# Altium PCB VNA_CHANNEL2.PcbDoc
Units mm, origin at the board's own origin, x right, y up, seen from the top; angles counter-clockwise.
Board outline 32.68 x 75 mm, 4 copper layers (Top Layer, GND, PWR, Bottom Layer), stack 0.758 mm thick; 166 components, 165 nets, 685 pads, 229 vias.
Unrouted connection lines stored in the file: 404.
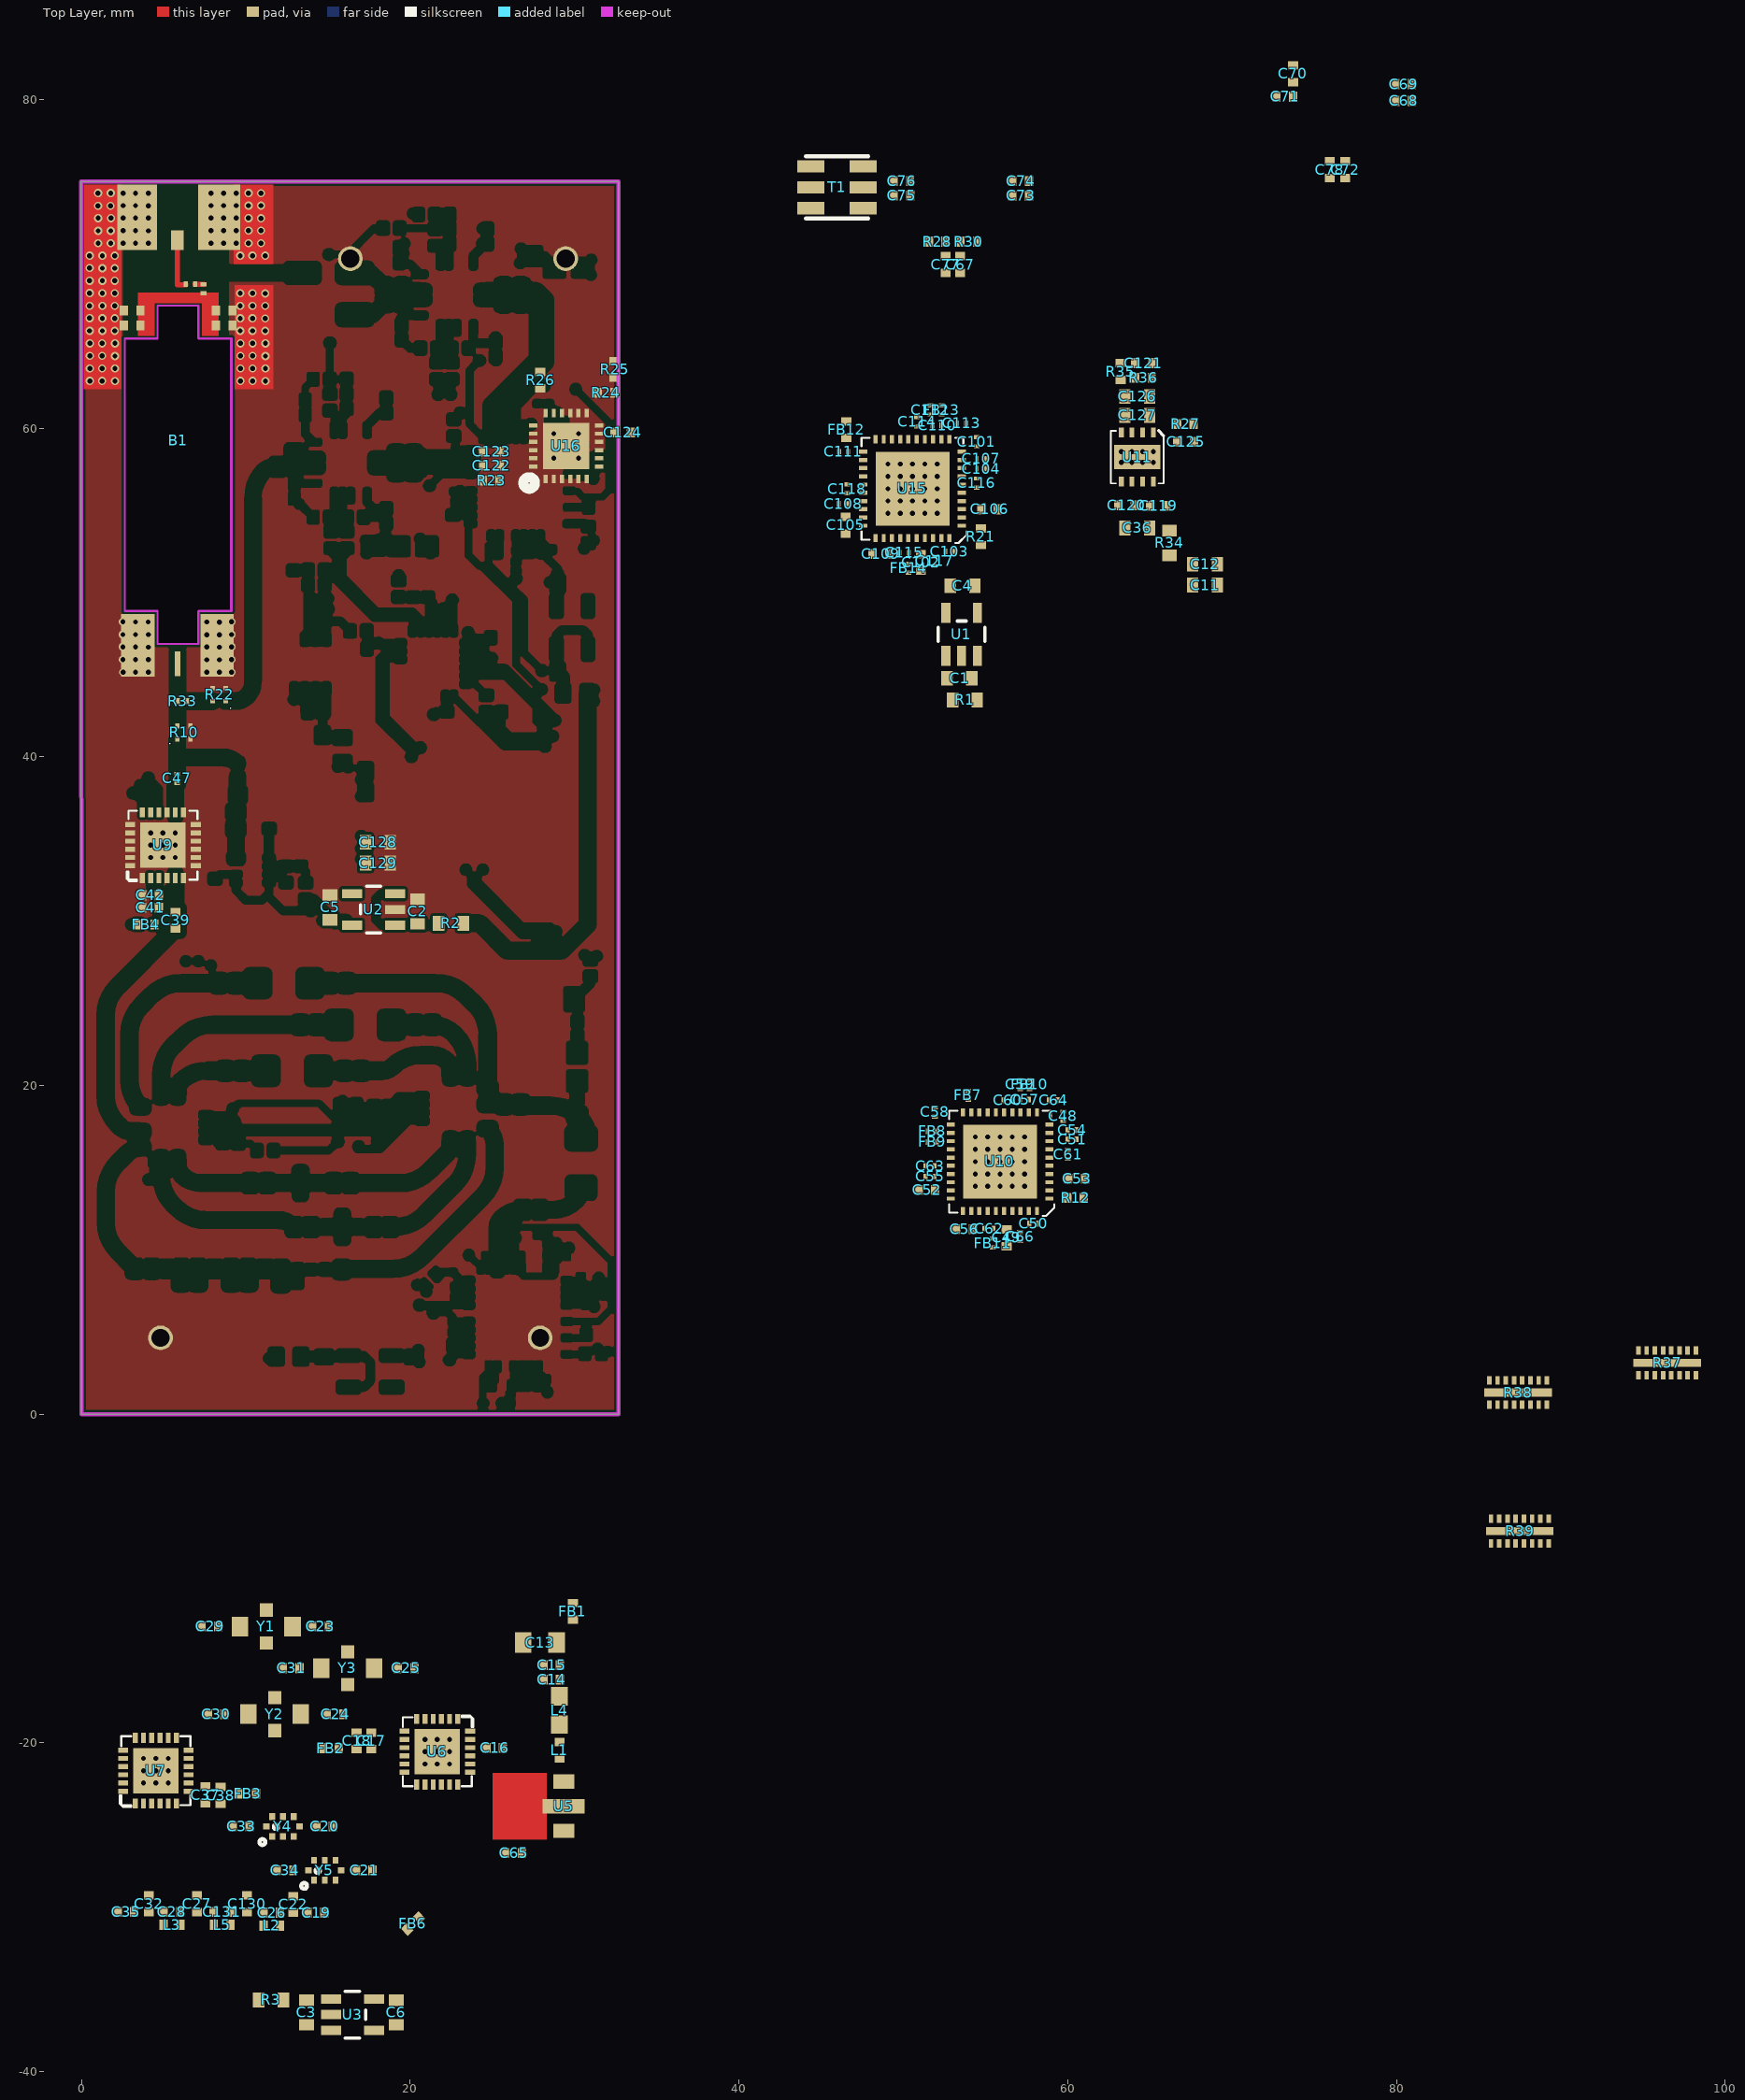
[diagram p0: Top Layer view]
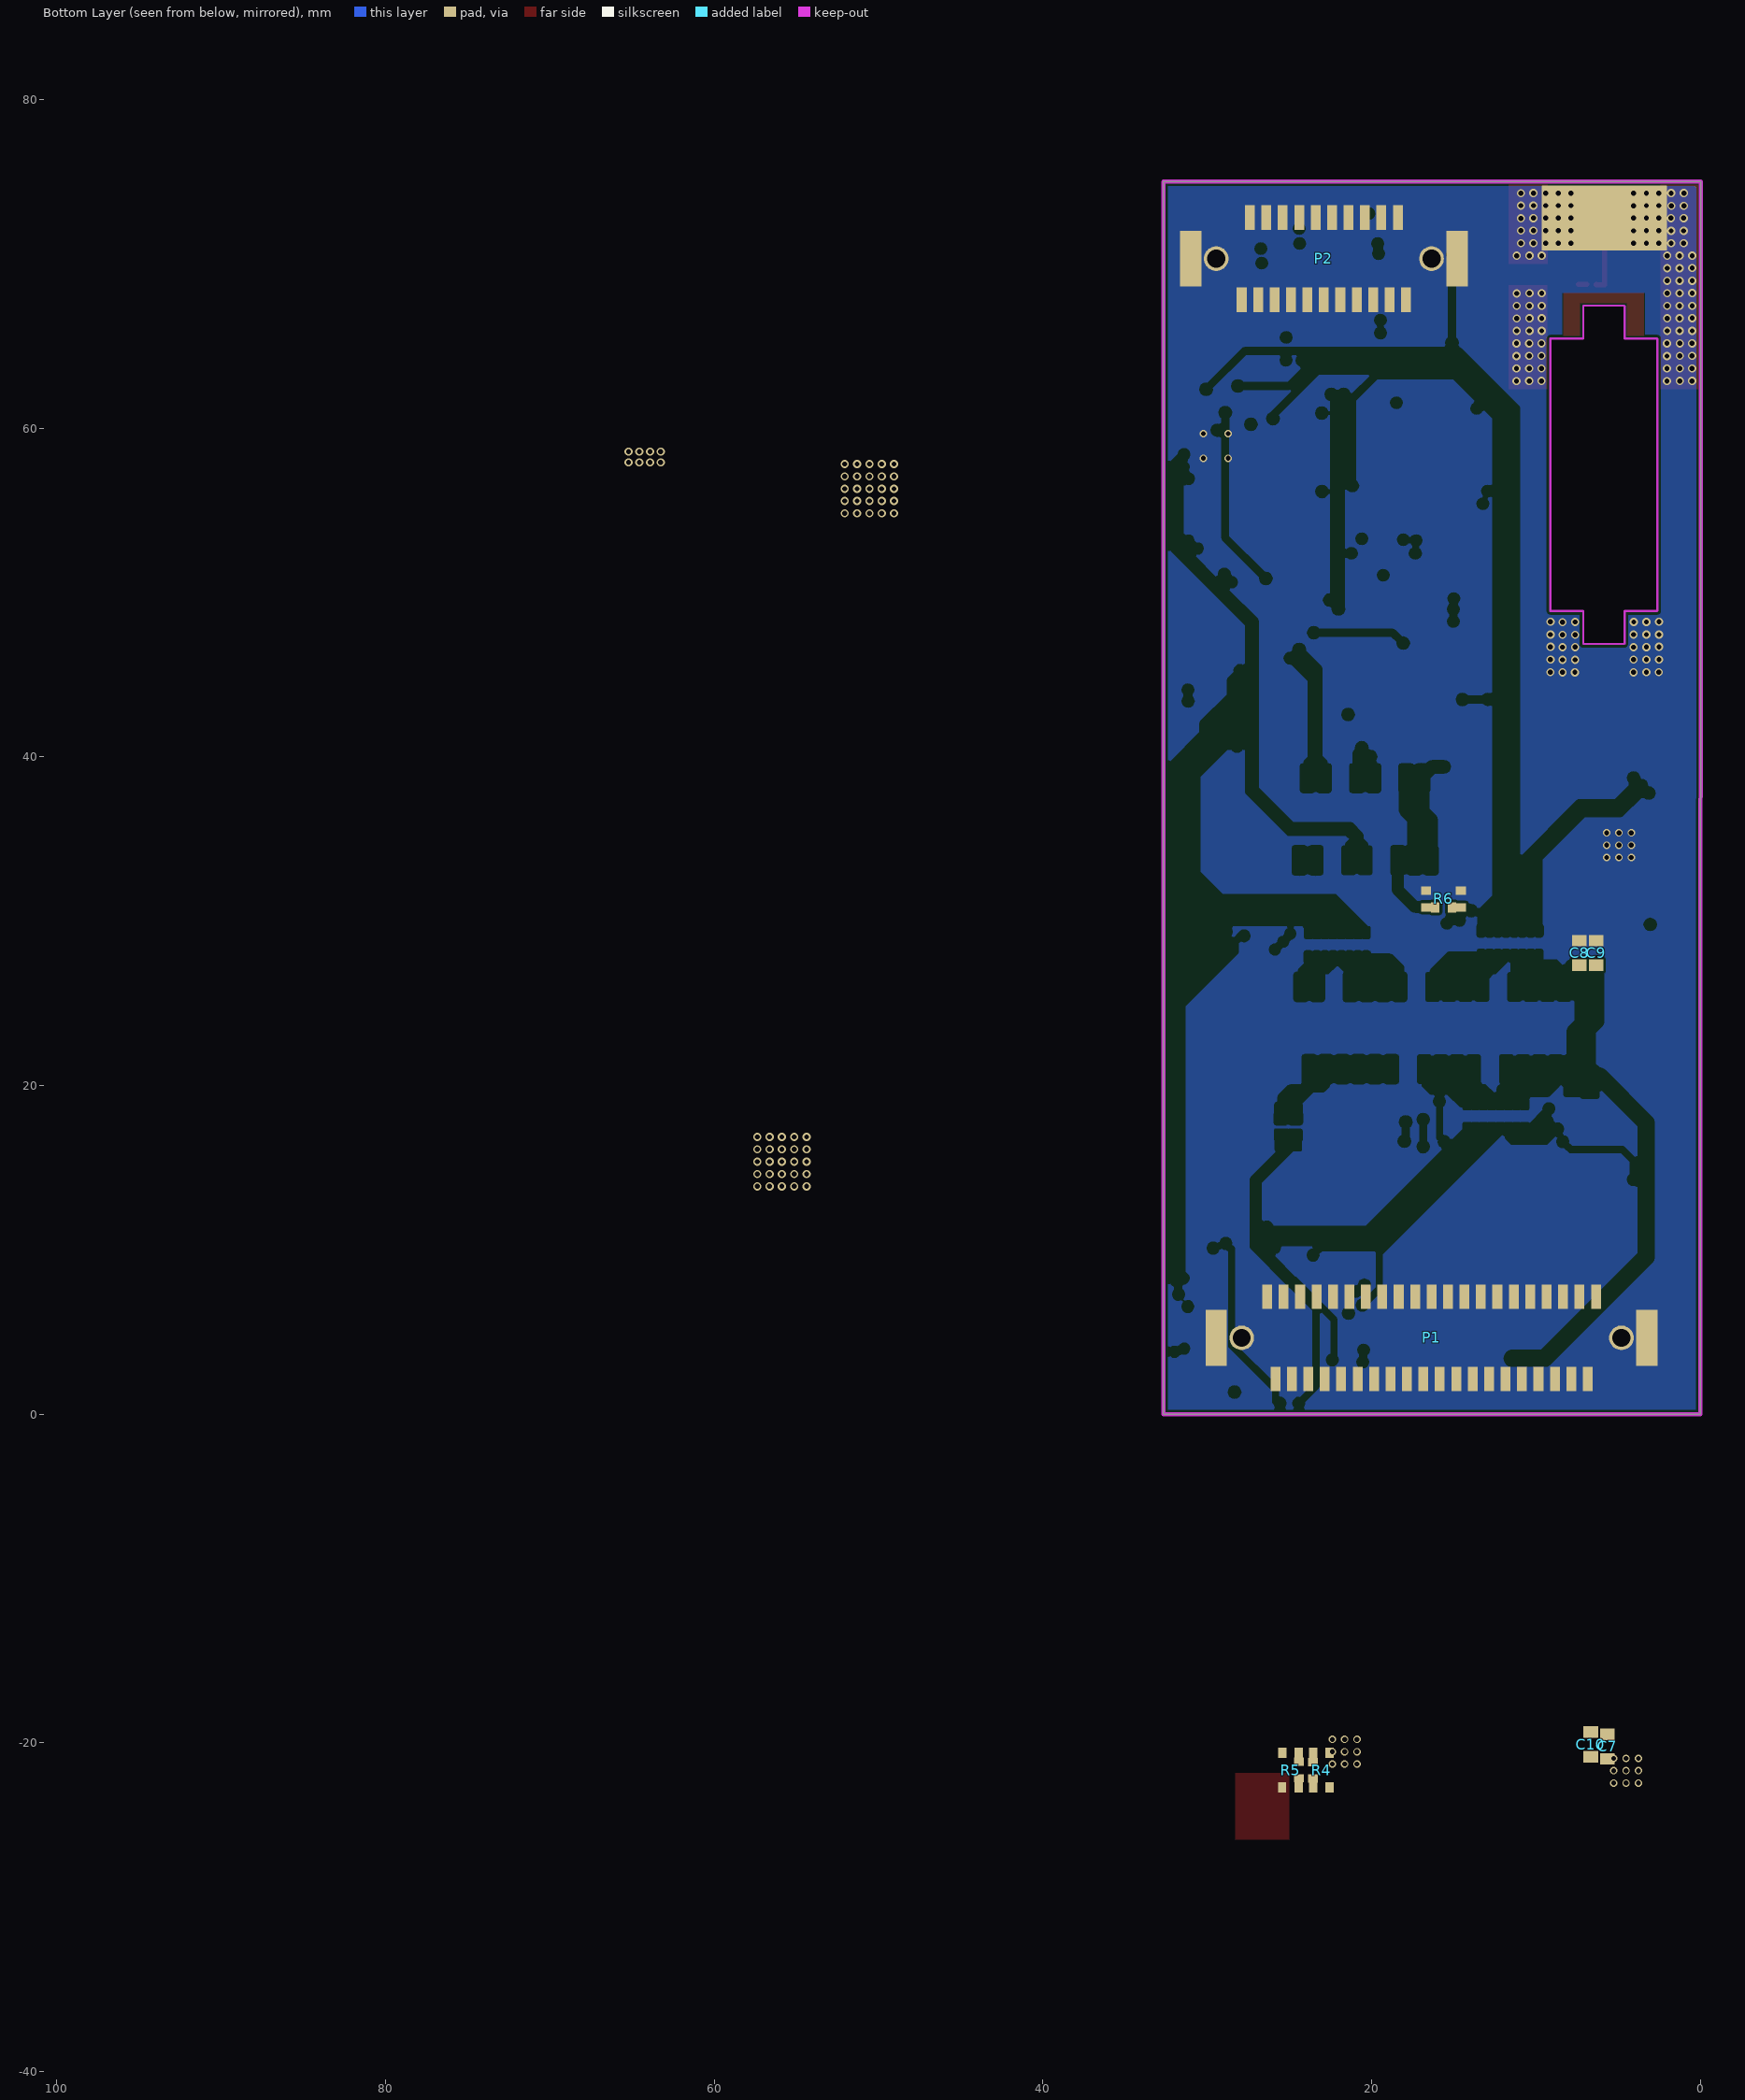
[diagram p1: Bottom Layer view, seen from below]
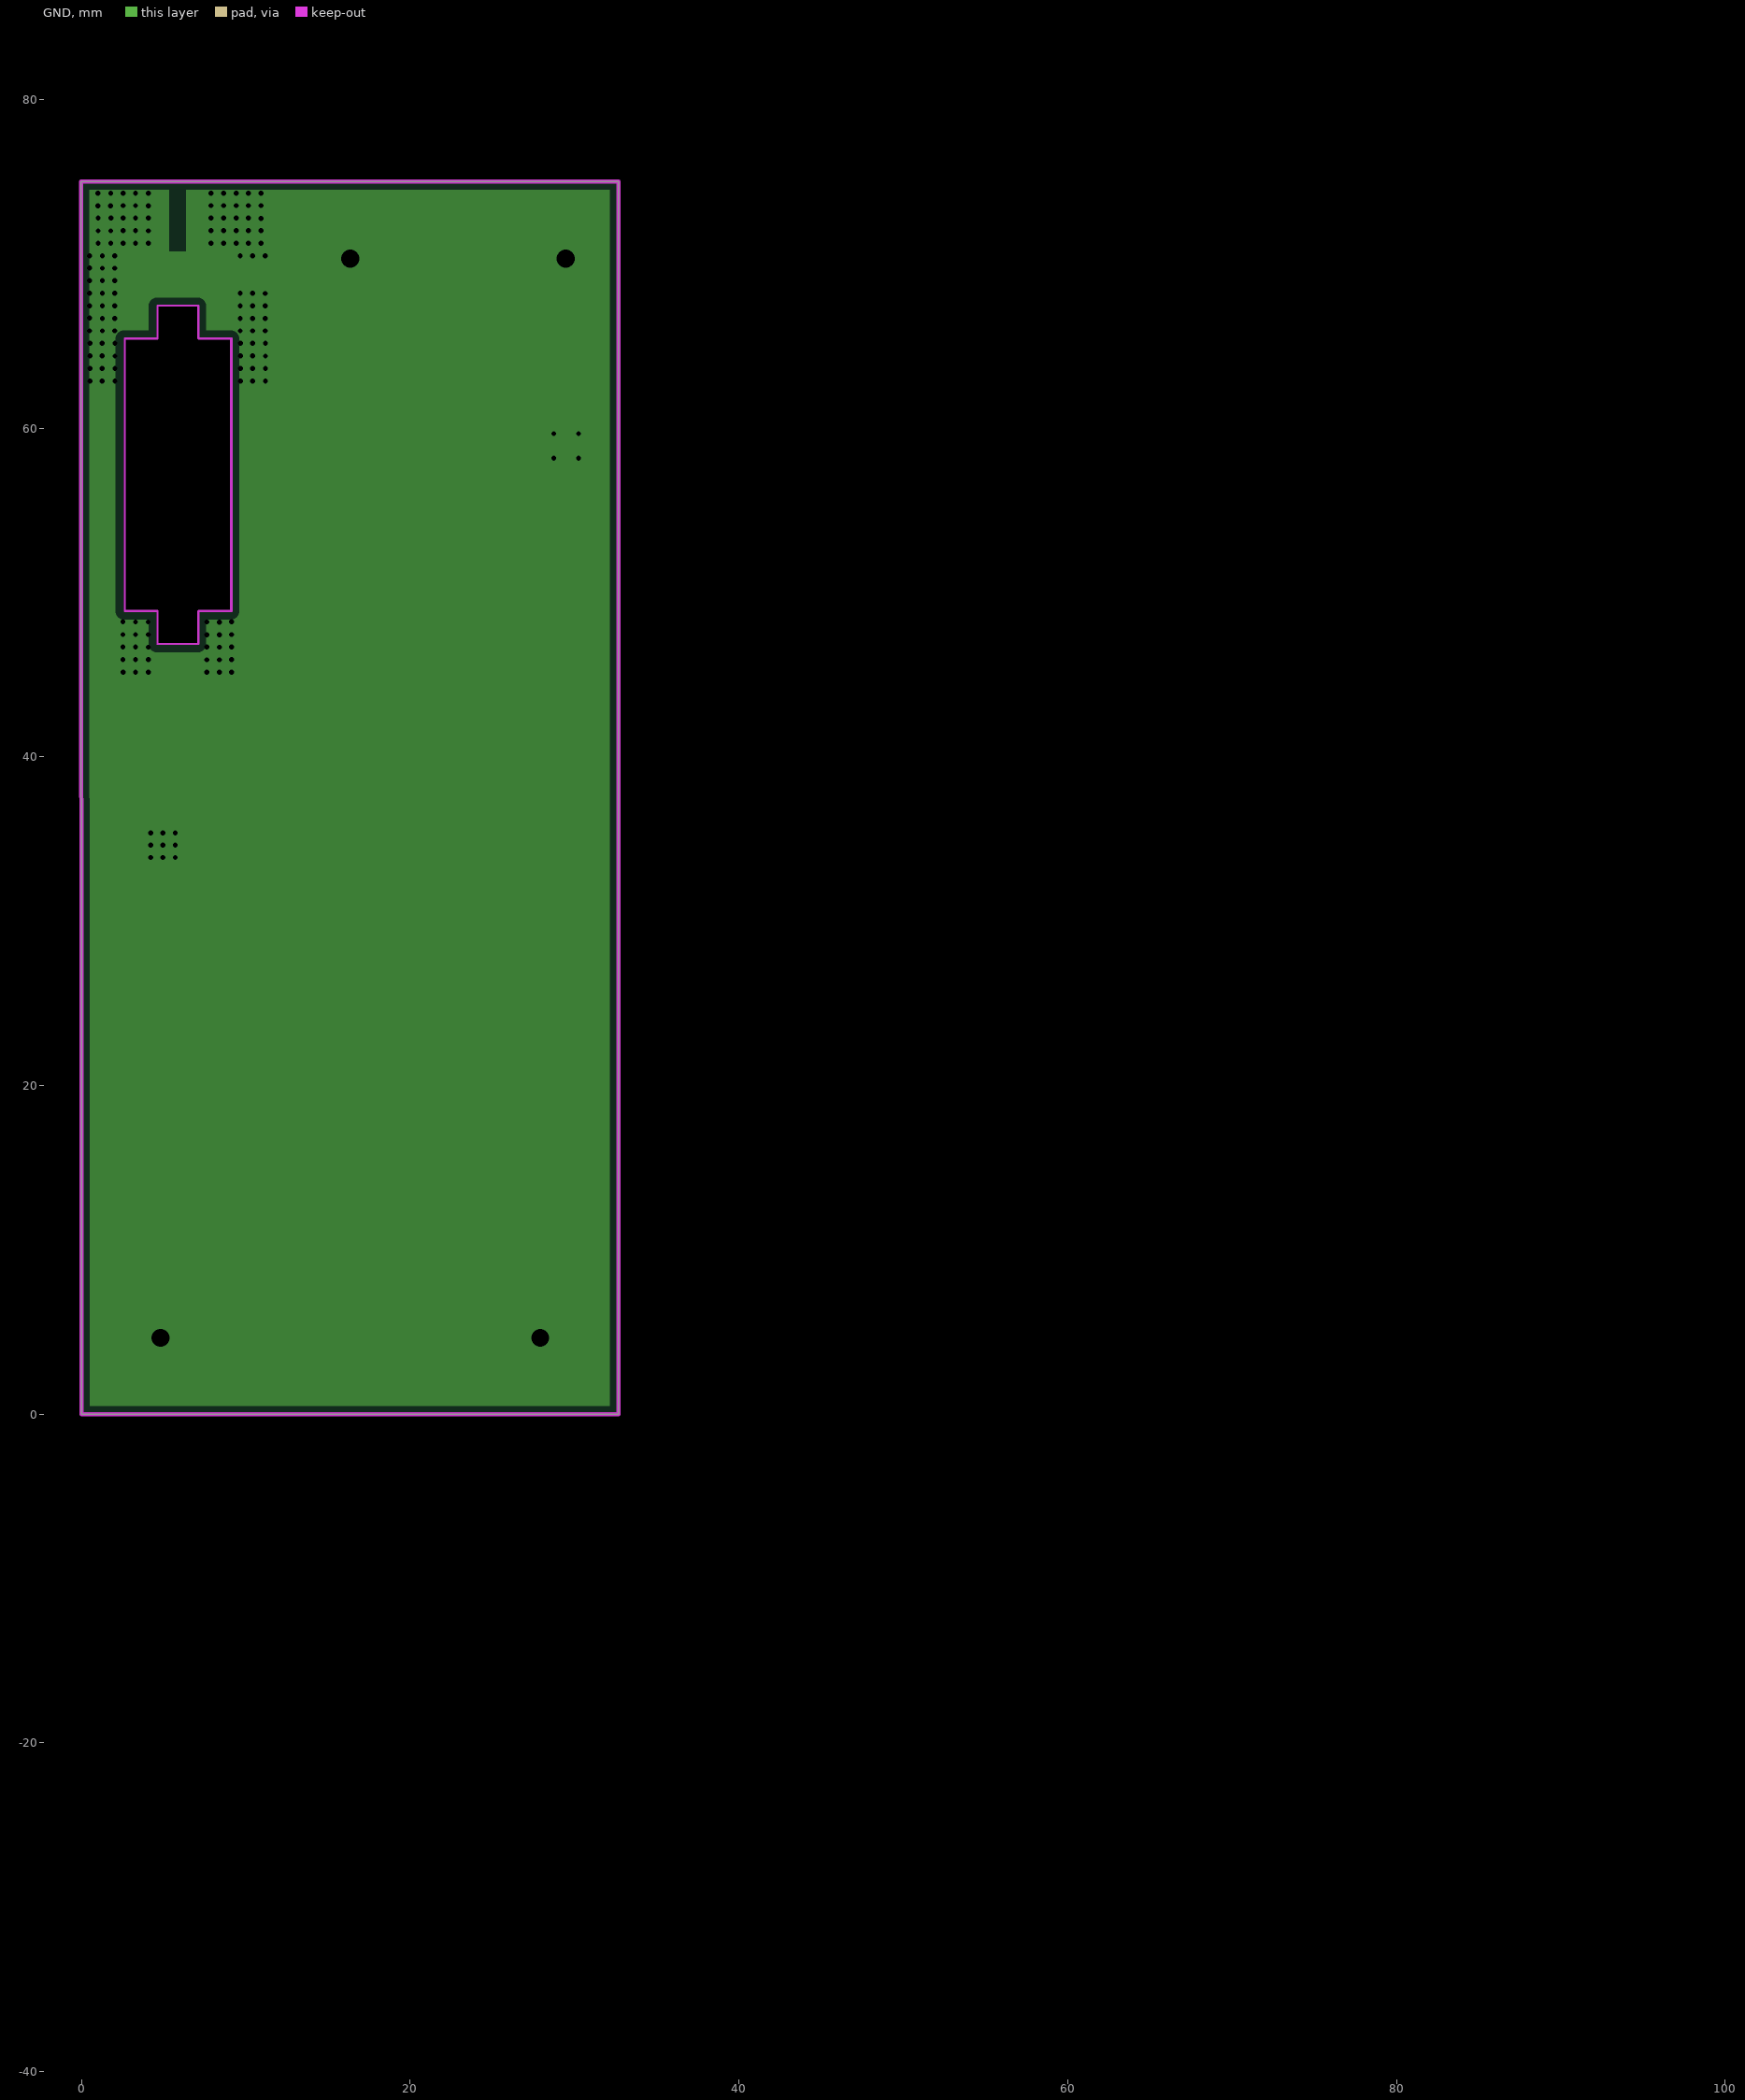
[diagram p2: GND, clearances drawn from the general rule]
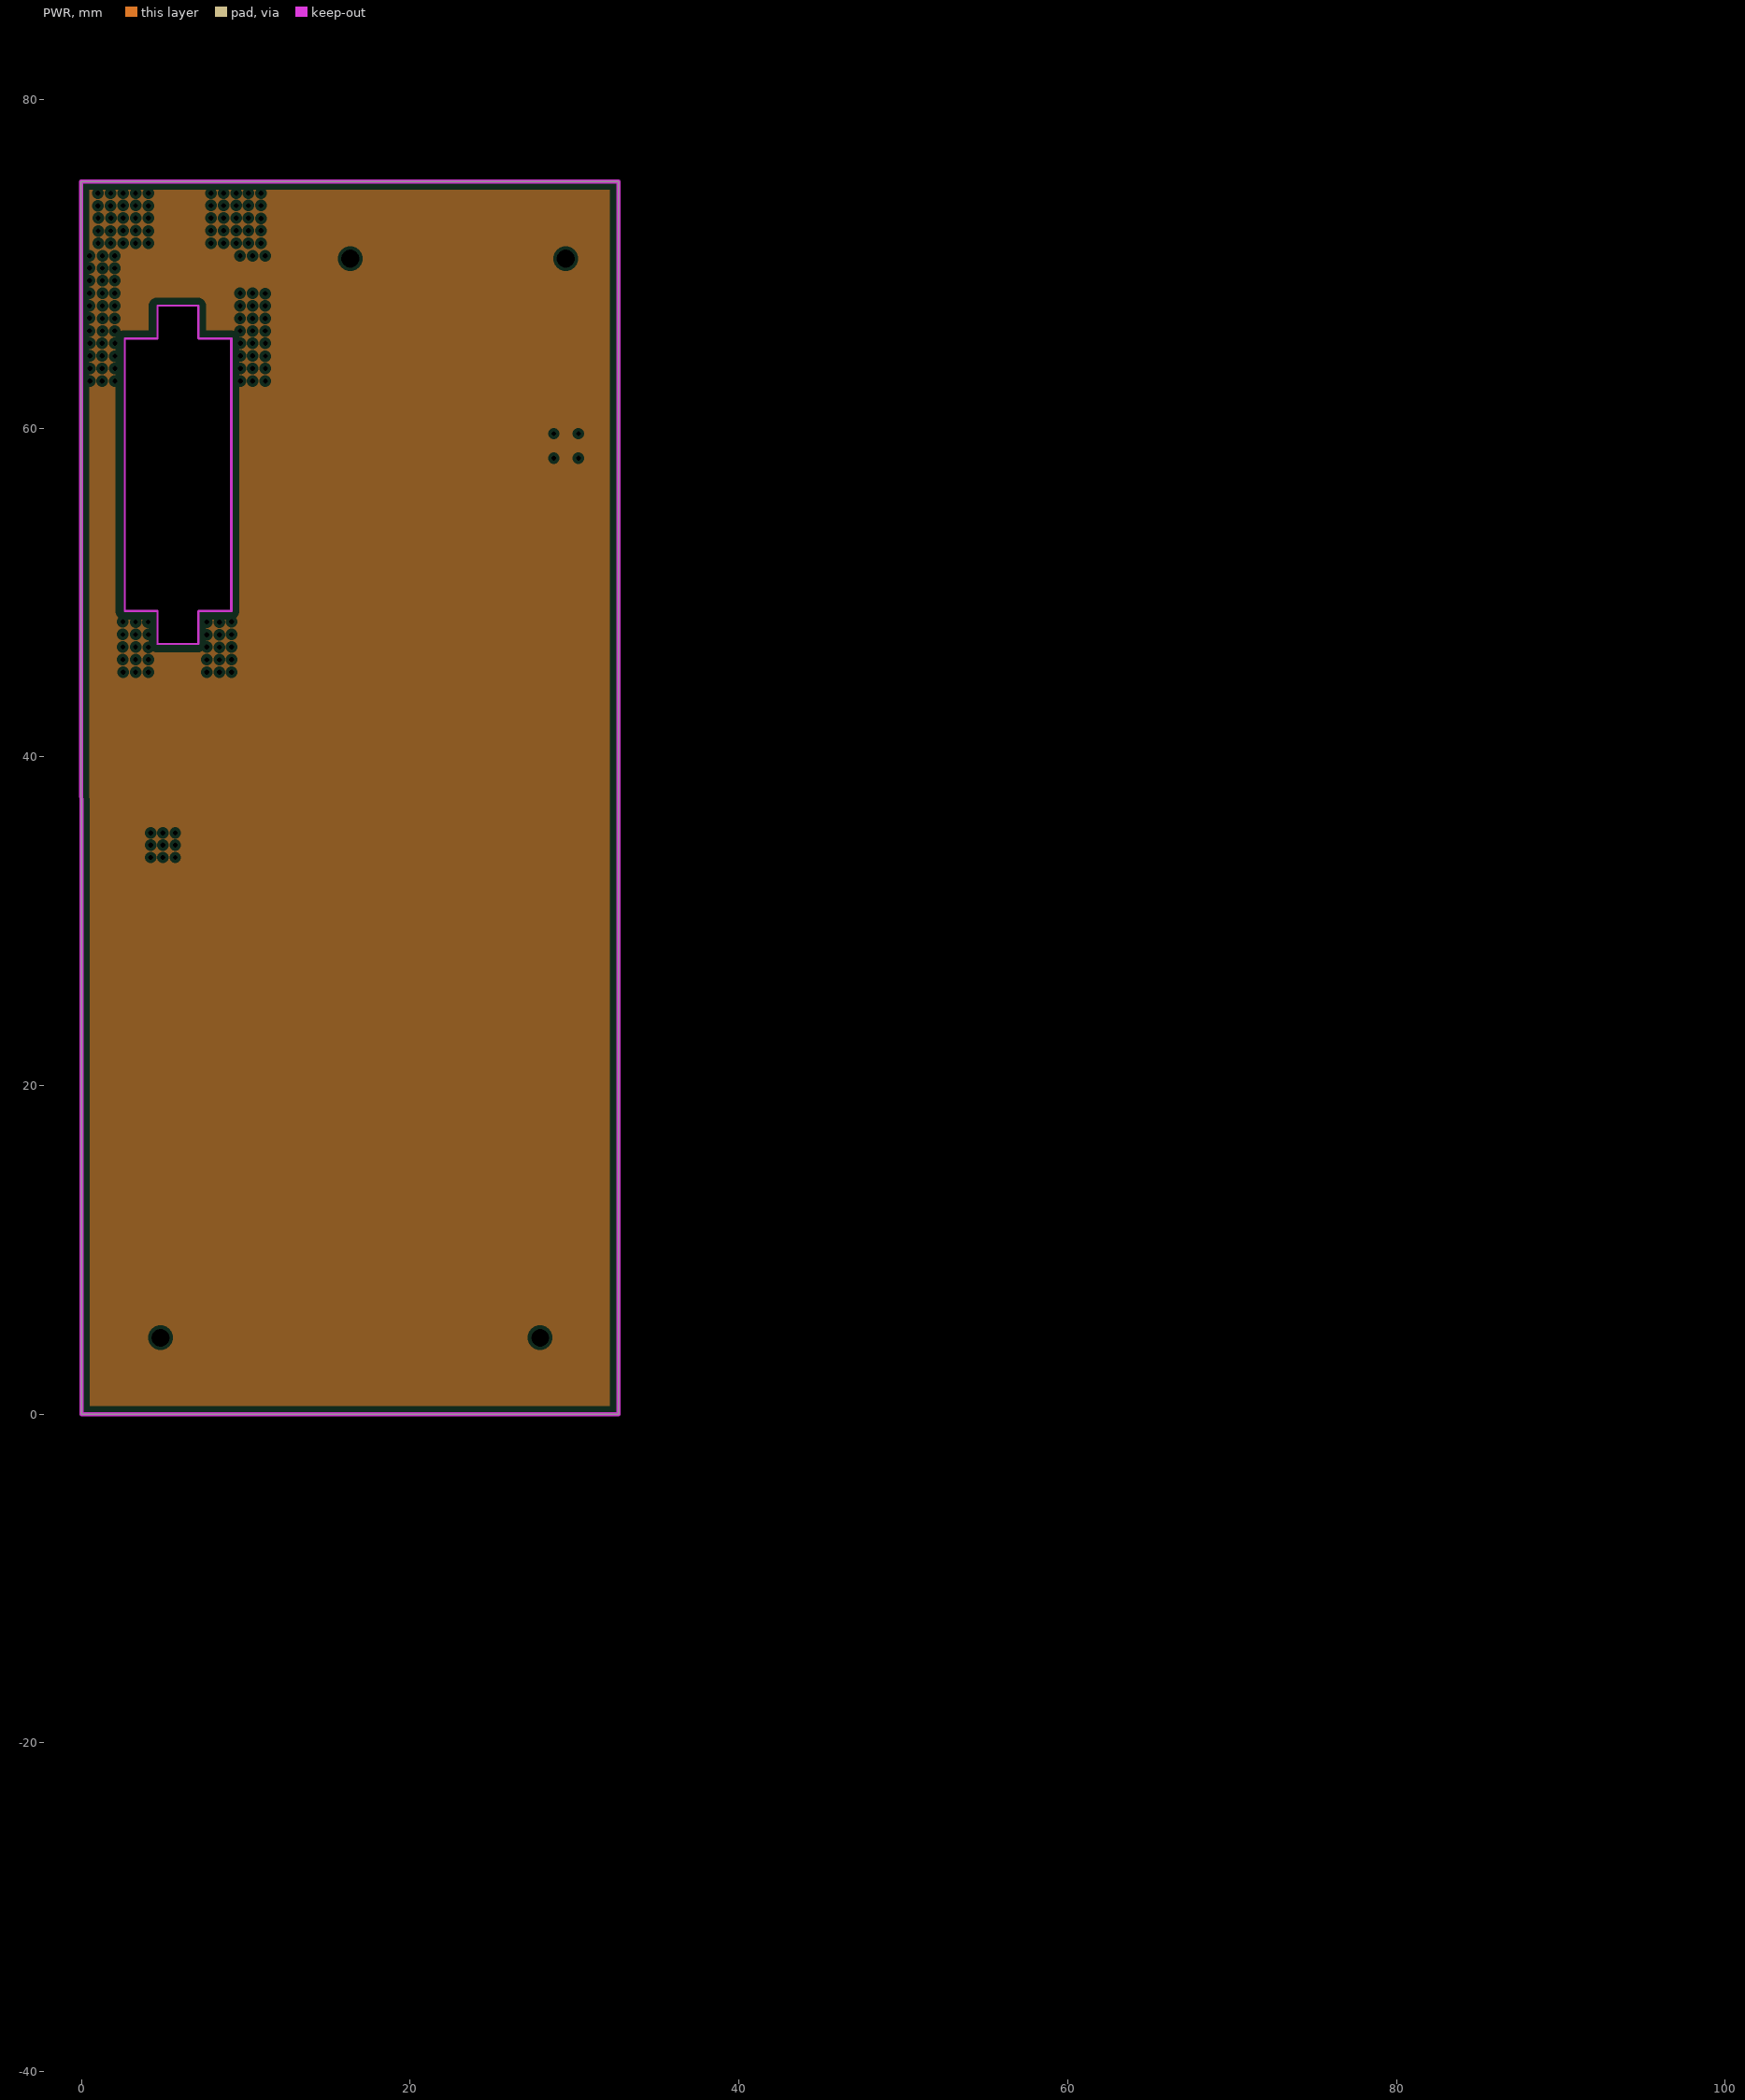
[diagram p3: PWR, clearances drawn from the general rule]

## Layer stack, top to bottom
Top Solder: solder mask 0.0102, Solder Resist, Dk 3.8
Top Layer: signal copper 0.0356
Dielectric 1: prepreg 0.1803, Dk 4.6
GND: plane copper 0.036, net GND
Dielectric 3: core 0.254, Dk 4.6
PWR: plane copper 0.036, net 3.6V
Dielectric 4: prepreg 0.1803, Dk 4.6
Bottom Layer: signal copper 0.0356
Bottom Solder: solder mask 0.0102, Solder Resist, Dk 3.8

## Board outline
0,0 -0.025,74.999 -0.009,74.999 32.659,74.999 32.659,0

## Design rules (kind name [scope] priority, off if disabled: settings)
Clearance 50R [InNetClass('50R') vs InPolygon] p1: gap=0.381 ignorepadtopadclearanceinfootprint=FALSE
Clearance [All] p2: gap=0.152 ignorepadtopadclearanceinfootprint=FALSE except(0: Arc-Hole Track-Hole SMDPad-Hole THPad-Hole Via-Hole Fill-Hole Poly-Hole Region-Hole Text-Hole)
DiffPairsRouting [All] p1: maxlimit=0.254 minlimit=0.254 mostfreqgap=0.254 toplayer_minwidth=0.152 toplayer_maxwidth=0.381 toplayer_prefwidth=0.381 bottomlayer_minwidth=0.152 bottomlayer_maxwidth=0.381 bottomlayer_prefwidth=0.381 maxuncoupledlength=12.7
MinimumSolderMaskSliver [All] p1 off: minsoldermaskwidth=0.254
PlaneClearance [All] p1: clearance=0.203
PlaneConnect [All] p1: planeconnectstyle=Direct reliefexpansion=0.508 reliefentries=4 reliefconductorwidth=0.254 reliefairgap=0.254
PolygonConnect [All] p1: connectstyle=Direct reliefconductorwidth=0.254 reliefentries=4 polygonreliefangle="90 Angle" airgapwidth=0.254
RoomDefinition source [InComponentClass('source')] p1 off: confinementstyle=ConfineIn formatcopy=TRUE lockcomponents=FALSE outline 37.244,116.767 197.111,116.767 197.111,126.292 37.244,126.292
RoomDefinition LO [InComponentClass('LO')] p2 off: confinementstyle=ConfineIn formatcopy=TRUE lockcomponents=FALSE outline 37.244,88.726 195.816,88.726 195.816,98.251 37.244,98.251
RoomDefinition IF_AMP [InComponentClass('IF_AMP')] p3 off: confinementstyle=ConfineIn formatcopy=TRUE lockcomponents=FALSE outline 37.244,79.378 100.515,79.378 100.515,87.456 37.244,87.456
RoomDefinition filterbank_amp [InComponentClass('filterbank_amp')] p4 off: confinementstyle=ConfineIn formatcopy=TRUE lockcomponents=FALSE outline 37.244,69.523 356.826,69.523 356.826,78.108 37.244,78.108
RoomDefinition bridge [InComponentClass('bridge')] p5 off: confinementstyle=ConfineIn formatcopy=TRUE lockcomponents=FALSE outline 37.244,28.604 117.838,28.604 117.838,36.478 37.244,36.478
RoomDefinition connector [InComponentClass('connector')] p6 off: confinementstyle=ConfineIn formatcopy=TRUE lockcomponents=FALSE outline 37.244,46.054 52.179,46.054 52.179,76.584 37.244,76.584
RoomDefinition mixer [InComponentClass('mixer')] p7 off: confinementstyle=ConfineIn formatcopy=TRUE lockcomponents=FALSE outline 26.144,64.57 258.554,64.57 258.554,73.46 26.144,73.46
RoomDefinition power [InComponentClass('power')] p8 off: confinementstyle=ConfineIn formatcopy=TRUE lockcomponents=FALSE outline 26.271,56.315 78.468,56.315 78.468,63.3 26.271,63.3
RoutingVias [All] p1: holewidth=0.305 width=0.508 viastyle="Through Hole" minholewidth=0.3 minwidth=0.45 maxholewidth=0.711 maxwidth=1.27
SilkToBoardRegionClearance [All] p1 off:
SilkToSilkClearance [All] p1 off: silktosilkclearance=0.254
SilkToSolderMaskClearance [IsPad] p1 off: minsilkscreentomaskgap=0.254 clearancetoexposedcopper=TRUE
SolderMaskExpansion [All] p1: expansion=0.102
Width [All] p1: maxlimit=1.524 minlimit=0.152 preferedwidth=0.152
23 further rules are at their usual default settings.

## Classes and differential pairs
component class power: C1 C2 C3 C4 C5 C6 C36 C119 C120 C121 C126 C127 R1 R2 R3 R34 R35 R36 U1 U2 U3 U11
component class connector: C7 C8 C9 C10 C11 C12 C128 C129 P1 P2 R4 R5 R6 R37 R38 R39
component class bridge: B1 R22 R33
component class filterbank_amp: C13 C14 C15 C16 C17 C18 C19 C20 C21 C22 C23 C24 C25 C26 C27 C28 C29 C30 C31 C32 C33 C34 C35 C37 C38 C39 C41 C42 C47 C130 C131 FB1 FB2 FB3 FB4 L1 L2 L3 L4 L5 R10 U5 U6 U7 U9 Y1 Y2 Y3 Y4 Y5
component class IF_AMP: C122 C123 C124 C125 R23 R24 R25 R26 R27 U16
component class LO: C101 C102 C103 C104 C105 C106 C107 C108 C109 C110 C111 C112 C113 C114 C115 C116 C117 C118 FB12 FB13 FB14 R21 U15
component class mixer: C67 C68 C69 C70 C71 C72 C73 C74 C75 C76 C77 C78 R28 R30 T1
component class source: C48 C49 C50 C51 C52 C53 C54 C55 C56 C57 C58 C59 C60 C61 C62 C63 C64 C65 C66 FB6 FB7 FB8 FB9 FB10 FB11 R12 U10
net class 50R: 250M 500M 900M 1800M 3600M 6000M dummy1 dummy2 dummy3 dummy4 LO1_N LO1_P LO2_N LO2_P NetB1_COUPLE NetB1_SOURCE NetC16_1 NetC16_2 NetC19_1 NetC19_2 NetC20_1 NetC20_2 NetC21_1 NetC21_2 NetC23_1 NetC23_2 NetC24_1 NetC24_2 NetC25_1 NetC25_2 NetC26_2 NetC27_2 NetC28_2 NetC29_1 NetC30_1 NetC31_1 NetC33_1 NetC34_1 NetC39_1 NetC39_2 NetC47_1 NetC47_2 NetC65_1 NetC65_2 NetC71_1 NetC75_1 NetC76_1 NetR22_3
differential pair REFL_IF_OUT: +REFL_IF_OUT_P -REFL_IF_OUT_N
differential pair REF_IF_OUT: +REF_IF_OUT_P -REF_IF_OUT_N
differential pair SOURCE_REF: +SOURCE_REF_P -SOURCE_REF_N
differential pair LO_REF: +LO_REF_P -LO_REF_N
differential pair LO2: +LO2_P -LO2_N
differential pair LO1: +LO1_P -LO1_N
differential pair REF_IF: +REF_IF_P -REF_IF_N
differential pair REFL_IF: +REFL_IF_P -REFL_IF_N

## Components (designator, comment, footprint, x,y, rotation, side; value= is the part's Value field where it differs from the comment)
B1 "BRIDGE" BRIDGE-4 4.055,48.2 r270 top
C1 "4.7uF" 0603L 53.416,44.78 r180 top
C2 "4.7uF" 0603L 20.447,30.582 r270 top
C3 "4.7uF" 0603L 13.69,-36.398 r90 top
C4 "4.7uF" 0603L 53.604,50.402 r180 top
C5 "4.7uF" 0603L 15.121,30.836 r270 top
C6 "4.7uF" 0603L 19.151,-36.398 r90 top
C7 "10uF" 0603L 5.664,-20.218 r90 bottom
C8 "10uF" 0603L 7.366,28.067 r270 bottom
C9 "10uF" 0603L 6.35,28.067 r270 bottom
C10 "10uF" 0603L 6.68,-20.091 r90 bottom
C11 "10uF" 0603L 68.351,50.444 r180 top
C12 "10uF" 0603L 68.351,51.714 r180 top
C13 "12nF" 0805 27.889,-13.894 r0 top
C14 "1nF" 0402 28.6,-16.154 r0 top
C15 "100pF" 0402 28.6,-15.265 r0 top
C16 "1nF" 0402 25.146,-20.295 r180 top
C17 "12nF" 0402 17.632,-19.872 r90 top
C18 "12nF" 0402 16.743,-19.872 r90 top
C19 "100pF" 0402 14.275,-30.328 r180 top
C20 "100pF" 0402 14.799,-25.079 r180 top
C21 "100pF" 0402 17.212,-27.746 r180 top
C22 "100pF" 0402 12.878,-29.82 r270 top
C23 "100pF" 0402 14.545,-12.913 r180 top
C24 "100pF" 0402 15.434,-18.247 r180 top
C25 "100pF" 0402 19.752,-15.453 r180 top
C26 "100pF" 0402 11.582,-30.328 r180 top
C27 "100pF" 0402 7.027,-29.778 r270 top
C28 "100pF" 0402 5.503,-30.286 r180 top
C29 "100pF" 0402 7.814,-12.913 r180 top
C30 "100pF" 0402 8.195,-18.247 r180 top
C31 "100pF" 0402 12.767,-15.453 r180 top
C32 "100pF" 0402 4.106,-29.778 r270 top
C33 "100pF" 0402 9.719,-25.079 r180 top
C34 "100pF" 0402 12.386,-27.746 r180 top
C35 "100pF" 0402 2.709,-30.286 r180 top
C36 "2.2uF" 0603L 64.231,53.919 r0 top
C37 "12nF" 0402 7.544,-23.165 r90 top
C38 "12nF" 0402 8.458,-23.19 r90 top
C39 "1nF" 0402 5.718,30.051 r90 top
C41 "12nF" 0402 4.194,30.813 r0 top
C42 "12nF" 0402 4.194,31.575 r0 top
C47 "12nF" 0201 5.817,38.684 r90 top
C48 "1uF" 0201 59.715,18.136 r270 top
C49 "10uF" 0402 56.278,10.732 r90 top
C50 "10nF" 0201 57.929,11.595 r180 top
C51 "0.1uF" 0201 60.266,16.726 r180 top
C52 "10uF" 0402 51.427,13.653 r0 top
C53 "0.47uF" 0402 60.553,14.326 r180 top
C54 "0.1uF" 0201 60.266,17.285 r180 top
C55 "0.1uF" 0201 51.63,14.465 r0 top
C56 "10uF" 0402 53.721,11.252 r0 top
C57 "NC" 0201 57.371,19.139 r180 top
C58 "1uF" 0201 51.917,18.39 r90 top
C59 "15nF" 0201 57.099,20.066 r270 top
C60 "1uF" 0201 56.362,19.101 r0 top
C61 "1uF" 0201 60.012,15.812 r270 top
C62 "2.2nF" 0201 55.212,11.29 r180 top
C63 "1uF" 0201 51.63,15.1 r180 top
C64 "1uF" 0201 59.131,19.101 r0 top
C65 "1nF" 0402 26.289,-26.695 r0 top
C66 "1uF" 0201 57.091,10.808 r270 top
C67 "1nF" 0402 53.462,69.946 r90 top
C68 "1nF" 0402 80.442,79.908 r180 top
C69 "1nF" 0402 80.442,80.924 r180 top
C70 "1nF" 0402 73.711,81.559 r270 top
C71 "1nF" 0402 73.203,80.162 r0 top
C72 "1nF" 0402 76.886,75.717 r90 top
C73 "1nF" 0402 57.145,74.137 r180 top
C74 "1nF" 0402 57.145,75.026 r180 top
C75 "1nF" 0402 49.911,74.143 r0 top
C76 "1nF" 0402 49.906,75.026 r0 top
C77 "1nF" 0402 52.573,69.946 r90 top
C78 "1nF" 0402 75.946,75.717 r90 top
C101 "1uF" 0201 54.462,59.169 r270 top
C102 "10uF" 0402 51.064,51.824 r90 top
C103 "10nF" 0201 52.811,52.489 r180 top
C104 "0.1uF" 0201 54.741,57.518 r180 top
C105 "10uF" 0402 46.492,54.085 r90 top
C106 "0.47uF" 0402 55.249,55.055 r180 top
C107 "0.1uF" 0201 54.741,58.128 r180 top
C108 "0.1uF" 0201 46.334,55.385 r0 top
C109 "10uF" 0402 48.626,52.332 r0 top
C110 "NC" 0201 52.049,60.16 r180 top
C111 "1uF" 0201 46.359,58.56 r180 top
C112 "15nF" 0201 51.642,61.1 r270 top
C113 "1uF" 0201 53.547,60.287 r0 top
C114 "1uF" 0201 50.836,60.384 r90 top
C115 "2.2nF" 0201 50.042,52.413 r180 top
C116 "1uF" 0201 54.462,56.655 r270 top
C117 "1uF" 0201 51.896,51.905 r270 top
C118 "1uF" 0201 46.588,56.299 r90 top
C119 "0.1uF" 0402 65.506,55.27 r180 top
C120 "470nF" 0402 63.576,55.296 r0 top
C121 "470nF" 0402 64.612,63.952 r180 top
C122 "12nF" 0402 24.943,57.709 r0 top
C123 "12nF" 0402 24.943,58.572 r0 top
C124 "12nF" 0402 32.928,59.732 r180 top
C125 "12nF" 0402 67.173,59.165 r0 top
C126 "0.1uF" 0603L 64.231,61.92 r0 top
C127 "2.2uF" 0603L 64.231,60.777 r0 top
C128 "10uF" 0603L 18.034,34.798 r180 top
C129 "10uF" 0603L 18.034,33.528 r180 top
C130 "100pF" 0402 10.075,-29.778 r270 top
C131 "100pF" 0402 8.551,-30.286 r180 top
FB1 "FB" 0402 29.896,-11.989 r270 top
FB2 "FB" 0402 15.164,-20.32 r180 top
FB3 "FB" 0402 10.109,-23.089 r0 top
FB4 "FB" 0402 3.94,29.797 r180 top
FB6 "FB" 0402 20.167,-30.988 r45 top
FB7 "50" 0201 53.949,19.406 r270 top
FB8 "50" 0201 51.765,17.221 r0 top
FB9 "50" 0201 51.765,16.561 r0 top
FB10 "330" 0201 57.683,20.066 r270 top
FB11 "0R" 0201 55.448,10.414 r270 top
FB12 "FB" 0402 46.537,59.906 r270 top
FB13 "330" 0201 52.328,61.1 r270 top
FB14 "0R" 0201 50.322,51.473 r270 top
L1 "Inductor" 0402 29.083,-20.447 r270 top value=10nH
L2 "0R" 0402 11.582,-31.115 r180 top
L3 "0R" 0402 5.512,-31.064 r180 top
L4 "Inductor" 0603 29.083,-18.009 r270 top value=10nH
L5 "0R" 0402 8.56,-31.064 r180 top
P1 "DF9-41S" DF9-41S 16.358,4.648 r0 bottom
P2 "DF9-21" DF9-21S 22.911,70.307 r180 bottom
R1 "FB" 0603L 53.746,43.459 r0 top value=0Ohm
R2 "FB" 0603L 22.479,29.87 r0 top value=0Ohm
R3 "FB" 0603L 11.531,-35.636 r180 top value=0Ohm
R4 "PiFilter" PiFIiter 23.571,-21.666 r90 bottom
R5 "PiFilter" PiFIiter 24.435,-21.641 r270 bottom
R6 "PiFilter" PiFIiter 15.621,30.836 r0 bottom
R10 "EXB24-RF-ATT" EXB24AT-RF-ATT 6.226,41.481 r90 top
R12 "10k" 0402 60.477,13.157 r180 top
R21 "10k" 0402 54.716,53.378 r90 top
R22 "EXB24-RF-ATT" EXB24AT-RF-ATT 8.382,43.79 r180 top
R23 "200R" 0402 24.927,56.811 r0 top
R24 "200R" 0402 31.912,62.145 r0 top
R25 "500R" 0402 32.436,63.576 r270 top
R26 "200R" 0402 27.915,62.916 r90 top
R27 "200R" 0402 67.157,60.249 r0 top
R28 "50R" 0402 52.065,71.343 r180 top
R30 "50R" 0402 53.97,71.343 r0 top
R33 "200" 0201 6.147,43.383 r180 top
R34 "FB" 0603L 66.192,53.01 r270 top value=0Ohm
R35 "10k" 0402 63.215,63.444 r270 top value=0Ohm
R36 "6.25k" 0402 64.612,63.063 r180 top value=0Ohm
R37 "NUF8xxx" NUF8xxx 96.469,3.124 r180 top
R38 "NUF8xxx" NUF8xxx 87.401,1.321 r0 top
R39 "NUF8xxx" NUF8xxx 87.503,-7.112 r0 top
T1 "TCM1-63AX+" TCM1-63AX+ 45.969,74.645 r90 top
U1 "RT9013-28GB" SOT23-5 53.543,47.447 r0 top
U2 "RT9013-28GB" SOT23-5 17.78,30.709 r90 top
U3 "RT9013-28GB" SOT23-5 16.484,-36.525 r270 top
U5 "AMP-SOT89" SOT-89 29.337,-23.851 r90 top
U6 "PE42462" PE42462 21.645,-20.533 r270 top
U7 "PE42462" PE42462 4.526,-21.689 r90 top
U9 "PE43711" PE43711 4.956,34.623 r90 top
U10 "LMX2572" LMX2572 55.881,15.367 r180 top
U11 "TPS7A8101" TPS7A8101 64.231,58.237 r270 top
U15 "LMX2572" LMX2572 50.559,56.312 r180 top
U16 "HMC960" HMC960 29.486,58.91 r90 top
Y1 "1748LP18A075" 1748LP18A075 11.243,-12.913 r180 top
Y2 "LFCN-6000" 1748LP18A075 11.751,-18.247 r180 top
Y3 "LFCN-3400" 1748LP18A075 16.196,-15.453 r180 top
Y4 "0868LP15A020" 5515LP15A730/0868LP15A020 12.259,-25.079 r0 top
Y5 "0500LP15A020" 5515LP15A730/0868LP15A020 14.799,-27.746 r0 top

## Footprints (in the part's own frame and the unit in brackets; to place one, negate y for a bottom-side part, rotate by r counter-clockwise, add the part's x,y. Pads: shape width x height; smd on the part's side, far side on the other; paste and mask are expansions set on the pad)
0201 [mm]
  rect 0.25x0.35 smd: 1(-0.275,0) 2(0.275,0)
  body extent -0.3,-0.15 0.3,0.15, height 0.23
0402 [mil] "0402-RES"
  rect 20x24 smd: 1(-19.68,0) 2(20,0)
0603 [mil] "0603-RES"
  rect 44x40 smd: 1(-33.46,0) 2(34,0)
  body extent -31,-16 31,16, height 31
0603L [mm]
  rect 0.7x0.9 smd: 1(-0.75,0) 2(0.75,0)
  body extent -0.8,-0.4 0.8,0.4, height 0.8
0805 [mm]
  rect 1x1.27 smd: 1(-1.016,0) 2(1.016,0)
  body extent -1.27,-0.76 1.27,0.76, height 0.8
1748LP18A075 [mm]
  rect 1x1.2 smd: 1(-1.6,0) 2(1.6,0)
  rect 0.8x0.8 smd: 3(0,-1) 4(0,1)
  body extent -1.6,-0.8 1.6,0.8, height 1
5515LP15A730/0868LP15A020 [mm]
  rect 0.35x0.4 smd: 1(-0.65,-0.6) 2(0,-0.6) 3(0.65,-0.6) 5(0.65,0.6) 6(0,0.6) 7(-0.65,0.6)
  rect 0.4x0.35 smd: 4(1,0) 8(-1,0)
  silkscreen extent -1.42,-1.12 -0.3,0.1, body extent -1,-0.6 1,0.6, height 0.85
BRIDGE-4 [mm]
  rect 0.25x0.35 smd: 2(-20,3.375) COUPLE(-20.55,3.375)
  rect 0.61x0.508 smd: 2(-18.946,-0.467) 2(-18.946,4.125) 2(-18.046,4.125) 2(-18.046,-0.467) GND(-18.946,-1.475) GND(-18.946,5.133) GND(-18.046,5.133) GND(-18.046,-1.475)
  rect 0.35x0.25 smd: COUPLE(-20.55,2.85) OUT(-20.55,2.3)
  rect 3.962x2.426 smd: GND(-24.621,-0.675)
  rect 3.962x2.565 smd: GND(-24.621,4.325)
  rect 3.962x7.62 smd far side: GND(-24.573,1.79)
  rect 3.81x2.032 smd: GND(1.409,4.203) GND(1.409,-0.623)
  rect 1.2x0.75 smd: OUT(-23.225,1.775)
  rect 1.5x0.33 smd: SOURCE(2.552,1.79)
  Top Layer region: -26.605,5.219 -21.779,5.219 -21.779,7.632 -26.605,7.632
  Top Layer region: -20.509,5.25 -14.159,5.25 -14.159,7.632 -20.509,7.632
  Top Layer region: -14.159,-1.625 -26.621,-1.625 -26.621,-3.925 -14.159,-3.925
  Top Layer region: -17.421,3.275 -19.421,3.275 -19.421,0.4 -17.421,0.4 -17.421,-0.6 -20.021,-0.6 -20.021,4.275 -17.421,4.275
  Top Layer pour cut-out: -17.116,4.945 -17.136,4.925 -26.464,4.925 -26.464,-1.555 -26.291,-1.555 -17.116,-1.555
  Top Layer lines w0.305: -22.7,1.787 -20.525,1.787 -20.525,2.3 -20.55,2.3 ; -20.55,3.375 -20.55,2.85 ; -20.55,2.85 -20.55,2.85
  GND region: -22.575,2.3 -26.639,2.3 -26.639,1.3 -22.575,1.3
  Keep-Out Layer board cut-out: -0.658,-1.47 -0.658,0.53 1.342,0.53 1.342,3.03 -0.658,3.03 -0.658,5.03 -17.239,5.03 -17.239,3.03 -19.239,3.03 -19.239,0.53 -17.239,0.53 -17.239,-1.47
  Keep-Out Layer lines w0.127: -0.665,-1.425 -0.665,0.575 1.335,0.575 1.335,3.075 -0.665,3.075 -0.665,5.075 -17.246,5.075 -17.246,3.075 -19.246,3.075 -19.246,0.575 -17.246,0.575 -17.246,-1.425 -0.665,-1.425
  body extent -20.7,2.28 -19.97,3.52, height 0.23
DF9-21S [mm]
  rect 1.3x3.4 smd: 0(-8.1,0) 0(8.1,0)
  round 1.5 hole 1.1: 0(-6.55,0) 0(6.55,0)
  rect 0.6x1.5 smd: 1(-5,-2.5) 2(-4,-2.5) 3(-3,-2.5) 4(-2,-2.5) 5(-1,-2.5) 6(0,-2.5) 7(1,-2.5) 8(2,-2.5) 9(3,-2.5) 10(4,-2.5) 11(5,-2.5) 12(4.5,2.5) 13(3.5,2.5) 14(2.5,2.5) 15(1.5,2.5) 16(0.5,2.5) 17(-0.5,2.5) 18(-1.5,2.5) 19(-2.5,2.5) 20(-3.5,2.5) 21(-4.5,2.5)
  body extent -8.05,-2.79 8.05,2.81, height 3.3
DF9-41S [mm]
  rect 1.3x3.4 smd: 0(-13.1,0) 0(13.1,0)
  round 1.5 hole 1.1: 0(-11.55,0) 0(11.55,0)
  rect 0.6x1.5 smd: 1(-10,-2.5) 2(-9,-2.5) 3(-8,-2.5) 4(-7,-2.5) 5(-6,-2.5) 6(-5,-2.5) 7(-4,-2.5) 8(-3,-2.5) 9(-2,-2.5) 10(-1,-2.5) 11(0,-2.5) 12(1,-2.5) 13(2,-2.5) 14(3,-2.5) 15(4,-2.5) 16(5,-2.5) 17(6,-2.5) 18(7,-2.5) 19(8,-2.5) 20(9,-2.5) 21(10,-2.5) 22(9.5,2.5) 23(8.5,2.5) 24(7.5,2.5) 25(6.5,2.5) 26(5.5,2.5) 27(4.5,2.5) 28(3.5,2.5) 29(2.5,2.5) 30(1.5,2.5) 31(0.5,2.5) 32(-0.5,2.5) 33(-1.5,2.5) 34(-2.5,2.5) 35(-3.5,2.5) 36(-4.5,2.5) 37(-5.5,2.5) 38(-6.5,2.5) 39(-7.5,2.5) 40(-8.5,2.5) 41(-9.5,2.5)
  body extent -13.05,-2.81 13.05,2.79, height 3.3
EXB24AT-RF-ATT [mm]
  rect 0.3x0.25 smd: 1(-0.4,-0.4) 2(0.4,-0.4) 3(0.4,0.4) 4(-0.4,0.4)
  body extent -0.5,-0.5 0.5,0.5, height 0.35
HMC960 [mm]
  rect 2.8x2.8 smd: 0(0,0)
  rect 0.5x0.25 smd: 1(-2,1.25) 2(-2,0.75) 3(-2,0.25) 4(-2,-0.25) 5(-2,-0.75) 6(-2,-1.25) 13(2,-1.25) 14(2,-0.75) 15(2,-0.25) 16(2,0.25) 17(2,0.75) 18(2,1.25)
  rect 0.25x0.5 smd: 7(-1.25,-2) 8(-0.75,-2) 9(-0.25,-2) 10(0.25,-2) 11(0.75,-2) 12(1.25,-2) 19(1.25,2) 20(0.75,2) 21(0.25,2) 22(-0.25,2) 23(-0.75,2) 24(-1.25,2)
  silkscreen extent -2.6,1.9 -1.9,2.6, body extent -2,-2 2,2, height 0.9
LMX2572 [mm]
  rect 4.5x4.5 smd: 0(0,0)
  rect 0.5x0.25 smd: 1(-3,2.25) 2(-3,1.75) 3(-3,1.25) 4(-3,0.75) 5(-3,0.25) 6(-3,-0.25) 7(-3,-0.75) 8(-3,-1.25) 9(-3,-1.75) 10(-3,-2.25) 21(3,-2.25) 22(3,-1.75) 23(3,-1.25) 24(3,-0.75) 25(3,-0.25) 26(3,0.25) 27(3,0.75) 28(3,1.25) 29(3,1.75) 30(3,2.25)
  rect 0.25x0.5 smd: 11(-2.25,-3) 12(-1.75,-3) 13(-1.25,-3) 14(-0.75,-3) 15(-0.25,-3) 16(0.25,-3) 17(0.75,-3) 18(1.25,-3) 19(1.75,-3) 20(2.25,-3) 31(2.25,3) 32(1.75,3) 33(1.25,3) 34(0.75,3) 35(0.25,3) 36(-0.25,3) 37(-0.75,3) 38(-1.25,3) 39(-1.75,3) 40(-2.25,3)
  silkscreen extent -3.3,-3.1 3.1,3.3, body extent -3,-3 3,3, height 1
NUF8xxx [mm]
  rect 4.1x0.5 smd: 0(0,0)
  rect 0.28x0.51 smd: 1(-1.75,-0.75) 2(-1.25,-0.75) 3(-0.75,-0.75) 4(-0.25,-0.75) 5(0.25,-0.75) 6(0.75,-0.75) 7(1.25,-0.75) 8(1.75,-0.75) 9(1.75,0.75) 10(1.25,0.75) 11(0.75,0.75) 12(0.25,0.75) 13(-0.25,0.75) 14(-0.75,0.75) 15(-1.25,0.75) 16(-1.75,0.75)
  body extent -2,-0.8 2,0.8, height 0.9
PE42462 [mm]
  rect 2.75x2.75 smd: 0(0,0)
  rect 0.6x0.3 smd: 1(-2,1.25) 2(-2,0.75) 3(-2,0.25) 4(-2,-0.25) 5(-2,-0.75) 6(-2,-1.25) 13(2,-1.25) 14(2,-0.75) 15(2,-0.25) 16(2,0.25) 17(2,0.75) 18(2,1.25)
  rect 0.3x0.6 smd: 7(-1.25,-2) 8(-0.75,-2) 9(-0.25,-2) 10(0.25,-2) 11(0.75,-2) 12(1.25,-2) 19(1.25,2) 20(0.75,2) 21(0.25,2) 22(-0.25,2) 23(-0.75,2) 24(-1.25,2)
  silkscreen extent -2.2,-2.1 2.1,2.2, body extent -2,-2 2,2, height 0.85
PE43711 [mm]
  rect 2.75x2.75 smd: 0(0,0)
  rect 0.6x0.3 smd: 1(-2,1.25) 2(-2,0.75) 3(-2,0.25) 4(-2,-0.25) 5(-2,-0.75) 6(-2,-1.25) 13(2,-1.25) 14(2,-0.75) 15(2,-0.25) 16(2,0.25) 17(2,0.75) 18(2,1.25)
  rect 0.3x0.6 smd: 7(-1.25,-2) 8(-0.75,-2) 9(-0.25,-2) 10(0.25,-2) 11(0.75,-2) 12(1.25,-2) 19(1.25,2) 20(0.75,2) 21(0.25,2) 22(-0.25,2) 23(-0.75,2) 24(-1.25,2)
  silkscreen extent -2.2,-2.1 2.1,2.2, body extent -2,-2 2,2, height 0.85
PiFIiter [mil]
  rect 24x20 smd: 1(-41,0) 2(42,-0.31) 3(-41,-39.68) 3(42,-40)
  rect 20x24 smd: 1(-19.68,0) 2(20,0)
SOT23-5 [mil] "SOT23-5"
  rect 22x48 smd: 1(-37.4,-51.19) 2(0,-51.19) 3(38,-51.19) 4(38,52) 5(-37.4,52)
  silkscreen extent -56,-17 56,32, body extent -57,-55 57,55, height 47
SOT-89 [mil]
  rect 34x50 smd: 1(-59.06,0) 3(59.06,0)
  rect 34x100 smd: 2(0,0)
  Top Layer region: -80.01,40 79.99,40 79.99,170 -80.01,170
  body extent -89,-22 89,147, height 59
TCM1-63AX+ [mm]
  rect 0.75x1.65 smd: 1(-1.27,1.6) 2(0,1.6) 3(1.27,1.6) 4(1.27,-1.6) 5(0,-1.6) 6(-1.27,-1.6)
  silkscreen extent -1.9,-1.9 1.9,1.9
TPS7A8101 [mm]
  rect 1.5x2.8 smd: 0(0,0)
  rect 0.6x0.3 smd: 1(-1.5,0.975) 2(-1.5,0.325) 3(-1.5,-0.325) 4(-1.5,-0.975) 5(1.5,-0.975) 6(1.5,-0.325) 7(1.5,0.325) 8(1.5,0.975)
  silkscreen extent -1.6,-1.6 1.6,1.6, body extent -1.5,-1.5 1.5,1.5, height 0.6

## Part data
C1 C2 C3 C4 C5 C6 C121: library part Cap, "Capacitor", LatestRevisionDate=17-Jul-2002, LatestRevisionNote="Re-released for DXP Platform.", PackageDescription="Radial Cap, Thru-Hole; 2 Leads; 0.3 in Pin Spacing", PackageReference=RAD-0.3, Published=8-Jun-2000, Publisher="Altium Limited"
C7 C8 C9 C10 C11 C12 C13 C14 C15 C16 C17 C18 C19 C20 C21 C22 C23 C24 C25 C26 C27 C28 C29 C30 C31 C32 C33 C34 C35 C36 C37 C38 C39 C41 C42 C47 C48 C49 C50 C51 C52 C53 C54 C55 C56 C57 C58 C59 C60 C61 C62 C63 C64 C65 C66 C67 C68 C69 C70 C71 C72 C73 C74 C75 C76 C77 C78 C101 C102 C103 C104 C105 C106 C107 C108 C109 C110 C111 C112 C113 C114 C115 C116 C117 C118 C119 C120 C122 C123 C124 C125 C126 C127 C128 C129 C130 C131: library part CAP0402-CAP, "<b>Capacitor</b> / Standard 0603 ceramic capacitor, and 0.1\" leaded capacitor.", PARTNO=CC0402ZRY5V7BB104
FB1 FB2 FB3 FB4 FB6 FB7 FB8 FB9 FB10 FB11 FB12 FB13 FB14 R1 R2 R3 R12 R21 R23 R24 R25 R26 R27 R28 R30 R33 R34 R35 R36: library part Res2, "Resistor", LatestRevisionDate=17-Jul-2002, LatestRevisionNote="Re-released for DXP Platform.", PackageDescription="Axial Device, Thru-Hole; 2 Leads; 0.4 in Pin Spacing", PackageReference=AXIAL-0.4, Published=8-Jun-2000, Publisher="Altium Limited"
L2 L3 L5: library part L/2.5*2.0
U1 U2 U3: library part LP5907
Y2 Y3: library part 1748LP18A075
Y4 Y5: library part 5515LP15A730/0868LP15A020
L1 L4: Code_IEC=1005, Code_JEITA=0402, LatestRevisionDate=29-May-2009, LatestRevisionNote="IPC-7351 Footprint Added.", PackageDescription="Chip Inductor", PackageReference=0402-A, Published=8-Jun-2000, Publisher="Altium Limited"

## Via types
v1: diameter 0.5, hole 0.305, Top Layer to Bottom Layer, tented both sides, 140 vias
v2: diameter 0.5, hole 0.3, Top Layer to Bottom Layer, tented both sides, 58 vias
v3: diameter 0.45, hole 0.3, Top Layer to Bottom Layer, tented both sides, 31 vias

## Nets (pads, with @x,y where several pads share a name; then routed paths per layer and width w, separated by ;. In a path a pad name is that pad's centre, name@x,y a point inside that pad or via, vN(x,y) a via of type N, cw(c..) or ccw(c..) an arc to the next point about the centre after c; other vN are vias at no path point)
3.3LO: C4.2 C113.1 C114.1 C116.1 C117.1 C118.1 FB12.1 R21.1 U1.5 U15.7 U15.11 U15.15 U15.26 U15.37
3.3Source: C6.2 C60.1 C61.1 C63.1 C64.1 C66.1 FB6.1 R12.1 U3.5 U10.7 U10.11 U10.15 U10.26 U10.37
3.6V: C7.2 C8.2 C9.2 C10.2 P1.1 P1.2 P1.40 P1.41 R1.2 R2.2 R3.2
5.5V: C11.2 C12.2 C128.2 C129.2 P2.10 P2.11 P2.12 P2.13 R34.2
5V-A: C121.1 C124.2 C126.2 C127.2 FB1.1 R23.1 R27.1 R36.1 U11.1 U11.2 U16.11
250M: C35.2 U7.24
500M: C34.2 U7.2
900M: C33.2 U7.4
1800M: C30.2 U7.15
3600M: C31.2 U7.17
6000M: C29.2 U7.19
dummy1: Y4.6
dummy2: Y5.6
dummy3: Y5.2
dummy4: Y4.2
GND: B1.GND C1.1 C2.1 C3.1 C4.1 C5.1 C6.1 C7.1 C8.1 C9.1 C10.1 C11.1 C12.1 C13.1 C14.1 C15.1 C17.2 C18.2 C22.1 C27.1 C32.1 C36.1 C37.1 C38.1 C41.1 C42.1 C48.1 C49.1 C50.1 C52.1 C53.1 C55.1 C56.1 C57.2 C58.2 C59.2 C60.2 C61.2 C62.2 C63.2 C64.2 C66.2 C70.1 C101.1 C102.1 C103.1 C105.1 C106.1 C108.1 C109.1 C110.2 C111.2 C112.2 C113.2 C114.2 C115.2 C116.2 C117.2 C118.2 C119.1 C120.1 C122.1 C123.1 C124.1 C125.1 C126.1 C127.1 C128.1 C129.1 C130.1 FB7.1 FB8.1 FB9.1 P1.0 P1.7 P1.12 P1.17 P1.20 P1.21 P1.22 P1.23 P1.30 P1.35 P2.0 P2.1 P2.2 P2.5 P2.8 P2.14 P2.17 P2.20 P2.21 R4.3 R5.3 R6.3 R10.1 R10.2 R22.1 R22.2 R25.1 R26.2 R35.2 R37.0 R38.0 R39.0 T1.1 T1.2 T1.5 U1.2 U2.2 U3.2 U5.2 U6.0 U6.1 U6.3 U6.5 U6.6 U6.7 U6.12 U6.13 U6.14 U6.16 U6.18 U6.20 U6.21 U6.23 U7.0 U7.3 U7.5 U7.6 U7.7 U7.12 U7.13 U7.14 U7.16 U7.18 U7.20 U7.21 U7.23 U9.0 U9.1 U9.4 U9.6 U9.7 U9.8 U9.9 U9.10 U9.11 U9.12 U9.13 U9.15 U9.19 U9.20 U9.21 U9.22 U9.23 U9.24 U10.0 U10.2 U10.4 U10.6 U10.13 U10.14 U10.25 U10.31 U10.34 U10.39 U10.40 U11.0 U11.4 U15.0 U15.2 U15.4 U15.6 U15.13 U15.14 U15.25 U15.31 U15.34 U15.39 U15.40 U16.0 U16.4 U16.5 U16.6 U16.7 U16.8 U16.9 U16.10 Y1.3 Y1.4 Y2.3 Y2.4 Y3.3 Y3.4 Y4.1 Y4.3 Y4.5 Y4.7 Y5.1 Y5.3 Y5.5 Y5.7
  other v1: 2.531,45.152 3.293,45.152 4.067,45.14 7.635,45.14 8.397,45.14 9.135,45.152 2.519,45.914 3.293,45.914 4.067,45.914 7.623,45.902 8.397,45.902 9.123,45.914 3.293,46.676 4.067,46.664 7.623,46.676 8.397,46.664 2.519,46.688 9.123,46.688 2.519,47.438 3.293,47.438 4.067,47.438 7.623,47.426 8.397,47.426 9.123,47.438 3.293,48.2 4.055,48.2 7.623,48.2 8.397,48.188 2.519,48.212 9.123,48.212 2.035,62.855 11.191,62.855 0.511,62.867 1.261,62.867 9.667,62.867 10.417,62.867 0.511,63.629 1.261,63.629 2.035,63.629 9.667,63.629 10.417,63.629 11.191,63.629 2.035,64.379 11.191,64.379 0.511,64.391 1.261,64.391 9.667,64.391 10.417,64.391 0.511,65.153 1.261,65.153 2.035,65.153 9.667,65.153 10.417,65.153 11.191,65.153 0.499,65.915 1.273,65.915 2.023,65.915 9.655,65.915 10.405,65.915 11.179,65.915 11.179,66.665 0.499,66.689 1.273,66.677 2.023,66.677 9.655,66.677 10.405,66.677 0.499,67.439 1.273,67.439 2.023,67.439 9.655,67.439 10.405,67.439 11.179,67.439 11.179,68.189 0.499,68.213 1.273,68.201 2.023,68.201 9.655,68.201 10.405,68.201 0.499,68.963 1.273,68.963 2.023,68.963 0.499,69.737 1.273,69.725 2.023,69.725 0.499,70.487 1.273,70.487 2.023,70.487 9.655,70.487 10.405,70.487 11.179,70.487 1.019,71.249 1.781,71.249 2.543,71.249 3.293,71.249 4.067,71.249 7.889,71.249 8.639,71.249 9.413,71.249 10.163,71.249 10.925,71.249 1.019,71.999 1.781,71.999 4.067,71.999 2.543,72.011 3.293,72.011 7.889,72.011 8.639,72.011 9.413,72.011 10.163,72.011 10.925,72.011 10.925,72.761 1.019,72.773 1.793,72.773 2.543,72.773 3.293,72.773 4.067,72.773 7.889,72.773 8.639,72.773 9.413,72.773 10.163,72.773 1.007,73.523 1.769,73.523 4.067,73.523 2.543,73.535 3.293,73.535 7.889,73.535 8.639,73.535 9.413,73.535 10.163,73.535 10.925,73.535 10.925,74.285 1.007,74.297 1.781,74.297 2.543,74.297 3.293,74.297 4.067,74.297 7.889,74.297 8.639,74.297 9.413,74.297 10.163,74.297
  other v2: 54.381,13.867 55.131,13.867 55.881,13.867 56.631,13.867 57.381,13.867 54.381,14.617 55.131,14.617 55.881,14.617 56.631,14.617 57.381,14.617 54.381,15.367 55.131,15.367 55.881,15.367 56.631,15.367 57.381,15.367 54.381,16.117 55.131,16.117 55.881,16.117 56.631,16.117 57.381,16.117 54.381,16.867 55.131,16.867 55.881,16.867 56.631,16.867 57.381,16.867 49.059,54.812 49.809,54.812 50.559,54.812 51.309,54.812 52.059,54.812 49.059,55.562 49.809,55.562 50.559,55.562 51.309,55.562 52.059,55.562 49.059,56.312 49.809,56.312 50.559,56.312 51.309,56.312 52.059,56.312 49.059,57.062 49.809,57.062 50.559,57.062 51.309,57.062 52.059,57.062 49.059,57.812 49.809,57.812 50.559,57.812 51.309,57.812 52.059,57.812 63.256,57.912 63.906,57.912 64.556,57.912 65.206,57.912 63.256,58.562 63.906,58.562 64.556,58.562 65.206,58.562
  other v3: 3.776,-22.439 4.526,-22.439 5.276,-22.439 3.776,-21.689 4.526,-21.689 5.276,-21.689 20.895,-21.283 21.645,-21.283 22.395,-21.283 3.776,-20.939 4.526,-20.939 5.276,-20.939 20.895,-20.533 21.645,-20.533 22.395,-20.533 20.895,-19.783 21.645,-19.783 22.395,-19.783 4.206,33.873 4.956,33.873 5.706,33.873 4.206,34.623 4.956,34.623 5.706,34.623 4.206,35.373 4.956,35.373 5.706,35.373 28.736,58.16 30.236,58.16 28.736,59.66 30.236,59.66
LO1_N: C74.1 U15.18
LO1_P: C73.1 U15.19
LO2_N: C69.1 U15.22
LO2_P: C68.1 U15.23
LO_REF_N: C107.1 P2.6
LO_REF_P: C104.1 P2.7
NetB1_COUPLE: B1.COUPLE T1.3
NetB1_OUT: B1.OUT
NetB1_SOURCE: B1.SOURCE R10.3 R33.2
NetC1_2: C1.2 R1.1 U1.1 U1.3
NetC2_2: C2.2 R2.1 U2.1 U2.3
NetC3_2: C3.2 R3.1 U3.1 U3.3
NetC13_2: C13.2 C14.2 C15.2 FB1.2 L4.1
NetC16_1: C16.1 L1.2 U5.3
NetC16_2: C16.2 U6.22
NetC17_1: C17.1 C18.1 FB2.1 U6.8
NetC19_1: C19.1 U6.19
NetC19_2: C19.2 C22.2 C26.1 L2.1
NetC20_1: C20.1 U6.15
NetC20_2: C20.2 Y4.4
NetC21_1: C21.1 U6.17
NetC21_2: C21.2 Y5.4
NetC23_1: C23.1 U6.24
NetC23_2: C23.2 Y1.1
NetC24_1: C24.1 U6.4
NetC24_2: C24.2 Y2.1
NetC25_1: C25.1 U6.2
NetC25_2: C25.2 Y3.1
NetC26_2: C26.2 C130.2 C131.1 L2.2 L5.1
NetC27_2: C27.2 C28.1 C131.2 L3.1 L5.2
NetC28_2: C28.2 C32.2 C35.1 L3.2
NetC29_1: C29.1 Y1.2
NetC30_1: C30.1 Y2.2
NetC31_1: C31.1 Y3.2
NetC33_1: C33.1 Y4.8
NetC34_1: C34.1 Y5.8
NetC36_2: C36.2 C119.2 R34.1 U11.5 U11.7 U11.8
NetC37_2: C37.2 C38.2 FB3.1 U7.1 U7.8
NetC39_1: C39.1 U7.22
NetC39_2: C39.2 U9.5
NetC41_2: C41.2 C42.2 FB4.1 U9.2 U9.3
NetC47_1: C47.1 U9.14
NetC47_2: C47.2 R10.4
NetC48_2: C48.2 U10.10
NetC49_2: C49.2 U10.36
NetC50_2: C50.2 U10.38
NetC51_2: C51.2 U10.8
NetC52_2: C52.2 U10.29
NetC53_2: C53.2 U10.3
NetC54_2: C54.2 U10.9
NetC55_2: C55.2 U10.27
NetC56_2: C56.2 U10.33
NetC57_1: C57.1 FB10.2 FB11.2 U10.12
NetC58_1: C58.1 FB6.2 U10.21
NetC59_1: C59.1 FB10.1
NetC62_1: C62.1 FB11.1 U10.35
NetC65_1: C65.1 U10.18
NetC65_2: C65.2 U5.1
NetC67_2: C67.2 R30.1
NetC71_1: C71.1 R22.4
NetC75_1: C75.1 T1.6
NetC76_1: C76.1 T1.4
NetC77_2: C77.2 R28.1
NetC101_2: C101.2 U15.10
NetC102_2: C102.2 U15.36
NetC103_2: C103.2 U15.38
NetC104_2: C104.2 U15.8
NetC105_2: C105.2 U15.29
NetC106_2: C106.2 U15.3
NetC107_2: C107.2 U15.9
NetC108_2: C108.2 U15.27
NetC109_2: C109.2 U15.33
NetC110_1: C110.1 FB13.2 FB14.2 U15.12
NetC111_1: C111.1 FB12.2 U15.21
NetC112_1: C112.1 FB13.1
NetC115_1: C115.1 FB14.1 U15.35
NetC120_2: C120.2 U11.6
NetC121_2: C121.2 R35.1 R36.2 U11.3
NetC122_2: C122.2 C123.2 R23.2 U16.21 U16.22
NetFB7_2: FB7.2 U10.19
NetFB8_2: FB8.2 U10.22
NetFB9_2: FB9.2 U10.23
NetL1_1: L1.1 L4.2
NetP1_3: P1.3 R38.16
NetP1_4: P1.4 R38.15
NetP1_5: P1.5 R38.14
NetP1_6: P1.6 R38.13
NetP1_8: P1.8 R38.12
NetP1_9: P1.9 R38.11
NetP1_10: P1.10 R38.10
NetP1_11: P1.11 R38.9
NetP1_13: P1.13 R37.16
NetP1_14: P1.14 R37.15
NetP1_15: P1.15 R37.14
NetP1_16: P1.16 R37.13
NetP1_18: P1.18 R37.12
NetP1_19: P1.19 R37.11
NetP1_24: P1.24 R5.1
NetP1_25: P1.25 R4.2
NetP1_31: P1.31 R39.8
NetP1_32: P1.32 R39.7
NetP1_33: P1.33 R39.6
NetP1_34: P1.34 R39.5
NetP1_36: P1.36 R39.4
NetP1_37: P1.37 R39.3
NetP1_38: P1.38 R39.2
NetP1_39: P1.39 R39.1
NetP2_9: P2.9 R6.2
NetR4_1: R4.1 U10.30
NetR5_2: R5.2 U10.32
NetR6_1: R6.1
NetR12_2: R12.2 U10.1
NetR21_2: R21.2 U15.1
NetR22_3: R22.3 R33.1
NetR24_1: R24.1 U16.13
NetR24_2: R24.2 R25.2 R37.2
NetR37_1: R37.1 U16.12
NetR37_3: R37.3 U16.14
NetR37_4: R37.4 U16.15
NetR37_5: R37.5 U15.30
NetR37_6: R37.6 U15.32
NetR38_1: R38.1 U9.18
NetR38_2: R38.2 U9.17
NetR38_3: R38.3 U9.16
NetR38_4: R38.4 U15.5
NetR38_5: R38.5 U15.20
NetR38_6: R38.6 U15.16
NetR38_7: R38.7 U15.17
NetR38_8: R38.8 U15.24
NetR39_9: R39.9 U10.5
NetR39_10: R39.10 U10.16
NetR39_11: R39.11 U10.17
NetR39_12: R39.12 U10.20
NetR39_13: R39.13 U10.24
NetR39_14: R39.14 U6.9 U7.9
NetR39_15: R39.15 U6.10 U7.10
NetR39_16: R39.16 U6.11 U7.11
OCM: C125.2 R26.1 R27.2 U16.1 U16.18
REF_IF_N: C72.1 U16.23
REF_IF_OUT_N: P2.16 U16.3
REF_IF_OUT_P: P2.15 U16.2
REF_IF_P: C78.1 U16.24
REFL_IF_N: C67.1 U16.19
REFL_IF_OUT_N: P2.19 U16.16
REFL_IF_OUT_P: P2.18 U16.17
REFL_IF_P: C77.1 U16.20
SOURCE_REF_N: C51.1 P2.3
SOURCE_REF_P: C54.1 P2.4
VCCSW: C5.2 FB2.2 FB3.2 FB4.2 U2.5
pads on no net: B1.2 C68.2 C69.2 C70.2 C71.2 C72.2 C73.2 C74.2 C75.2 C76.2 C78.2 P1.26 P1.27 P1.28 P1.29 R28.2 R30.2 R37.7 R37.8 R37.9 R37.10 U1.4 U2.4 U3.4 U10.28 U15.28

## Polygon pours and split planes (outlines as drawn)
GND on Bottom Layer "GND_L04_P004" (solid, remove dead copper, pour order 4): 0,0 -0.025,74.999 -0.009,74.999 32.659,74.999 32.659,0
GND on Top Layer "GND_L01_P003" (solid, remove dead copper, pour order 3): 0,0 -0.025,74.999 -0.009,74.999 32.659,74.999 32.659,0
3.6V on PWR (split plane): 32.149,0.51 0.51,0.51 0.486,74.489 32.149,74.489
GND on GND (split plane): 32.149,0.51 0.51,0.51 0.486,74.489 5.355,74.489 5.355,70.775 6.355,70.775 6.355,74.489 32.149,74.489

## Keep-outs
Keep-Out Layer:
  lines w0.254: -0.025,74.999 0,0 32.659,0 32.659,74.999 -0.009,74.999

## Other copper
Bottom Layer:
  pour cut-out: 3.4,68.2 8.4,68.2 8.4,65.446 3.4,65.446
GND (plane layer: these items are gaps in the copper):
  region: 18.4,-16.286 18.4,-14.533 17.181,-14.533 17.181,-16.286
  region: 15.2,-16.286 15.2,-14.533 13.981,-14.533 13.981,-16.286
  region: 13.955,-19.08 13.955,-17.327 12.736,-17.327 12.736,-19.08
  region: 10.755,-19.08 10.755,-17.327 9.536,-17.327 9.536,-19.08
  region: 13.447,-13.746 13.447,-11.993 12.228,-11.993 12.228,-13.746
  region: 10.247,-13.746 10.247,-11.993 9.028,-11.993 9.028,-13.746
  rectangle: 46.736,72.771 48.488,73.99
  rectangle: 46.736,75.311 48.488,76.53
  rectangle: 43.536,75.311 45.288,76.53

## Silkscreen, mask and mechanical layers (free items; w line width, h text height)
Top Solder:
  rectangle: 6.655,67.564 7.264,68.478
  rectangle: 2.21,68.224 9.652,74.727
Bottom Solder:
  rectangle: 1.778,45.001 9.666,48.717
  rectangle: -0.009,62.4 11.8,74.999
  rectangle: 24.7,3.8 27.7,7.2
  rectangle: 27.5,10.9 31.3,20.8
  rectangle: 12.7,43.9 17.6,47.6
  rectangle: 19,43.1 23,47.2
  rectangle: 20.2,65.9 26.1,70.7
  rectangle: 13.6,55 19.8,60.8
  rectangle: 23.8,54 28.5,59.1